# Altium PCB xxxxxx_PCB_Spectrum_Analyzer_x_Panel.PcbDoc
Units mm, origin at the board's own origin, x right, y up, seen from the top; angles counter-clockwise.
Board outline 118 x 144 mm, 4 copper layers (Top Layer, GND, 5V4, Bottom Layer), stack 1.31 mm thick; 10 components, 0 nets, 9 pads, 0 vias.
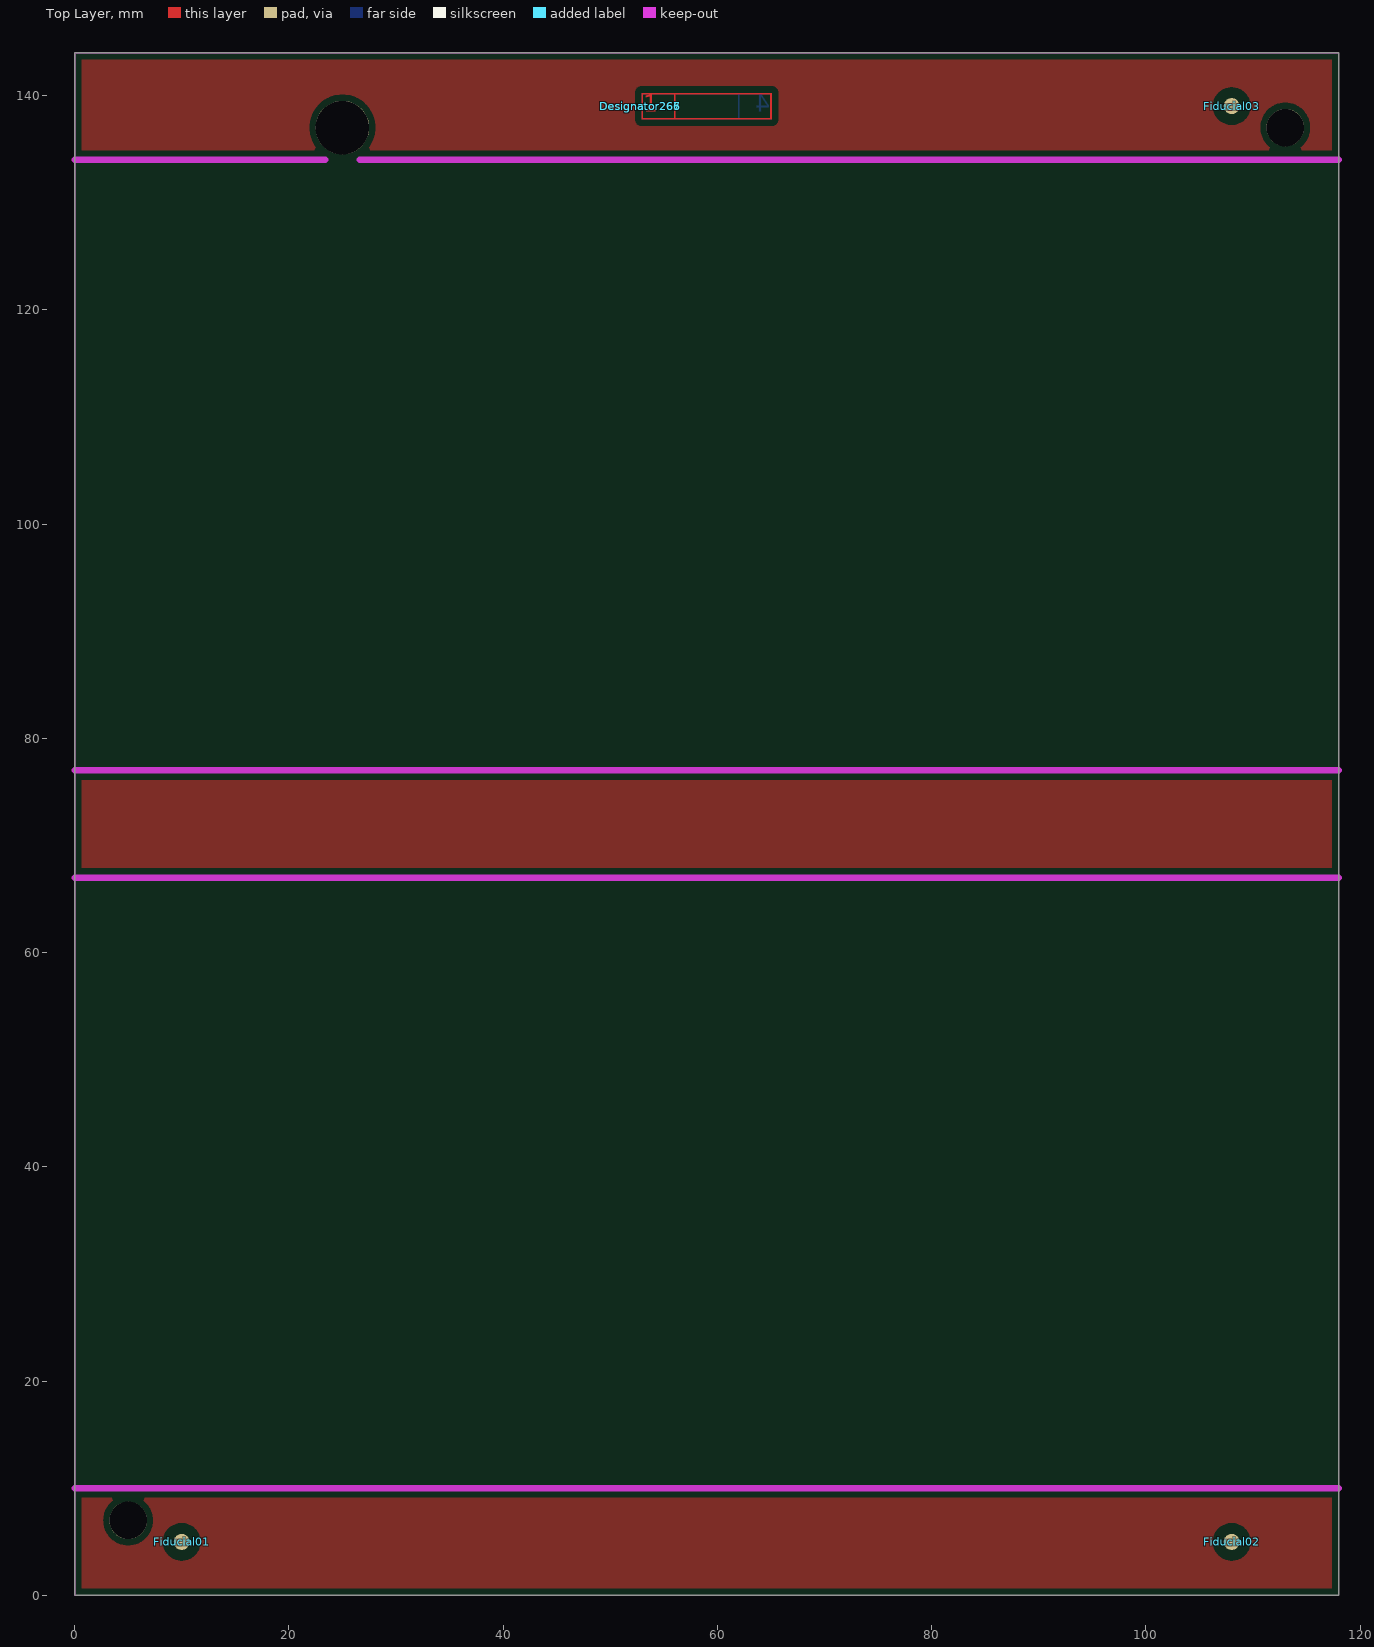
[diagram p0: Top Layer view]
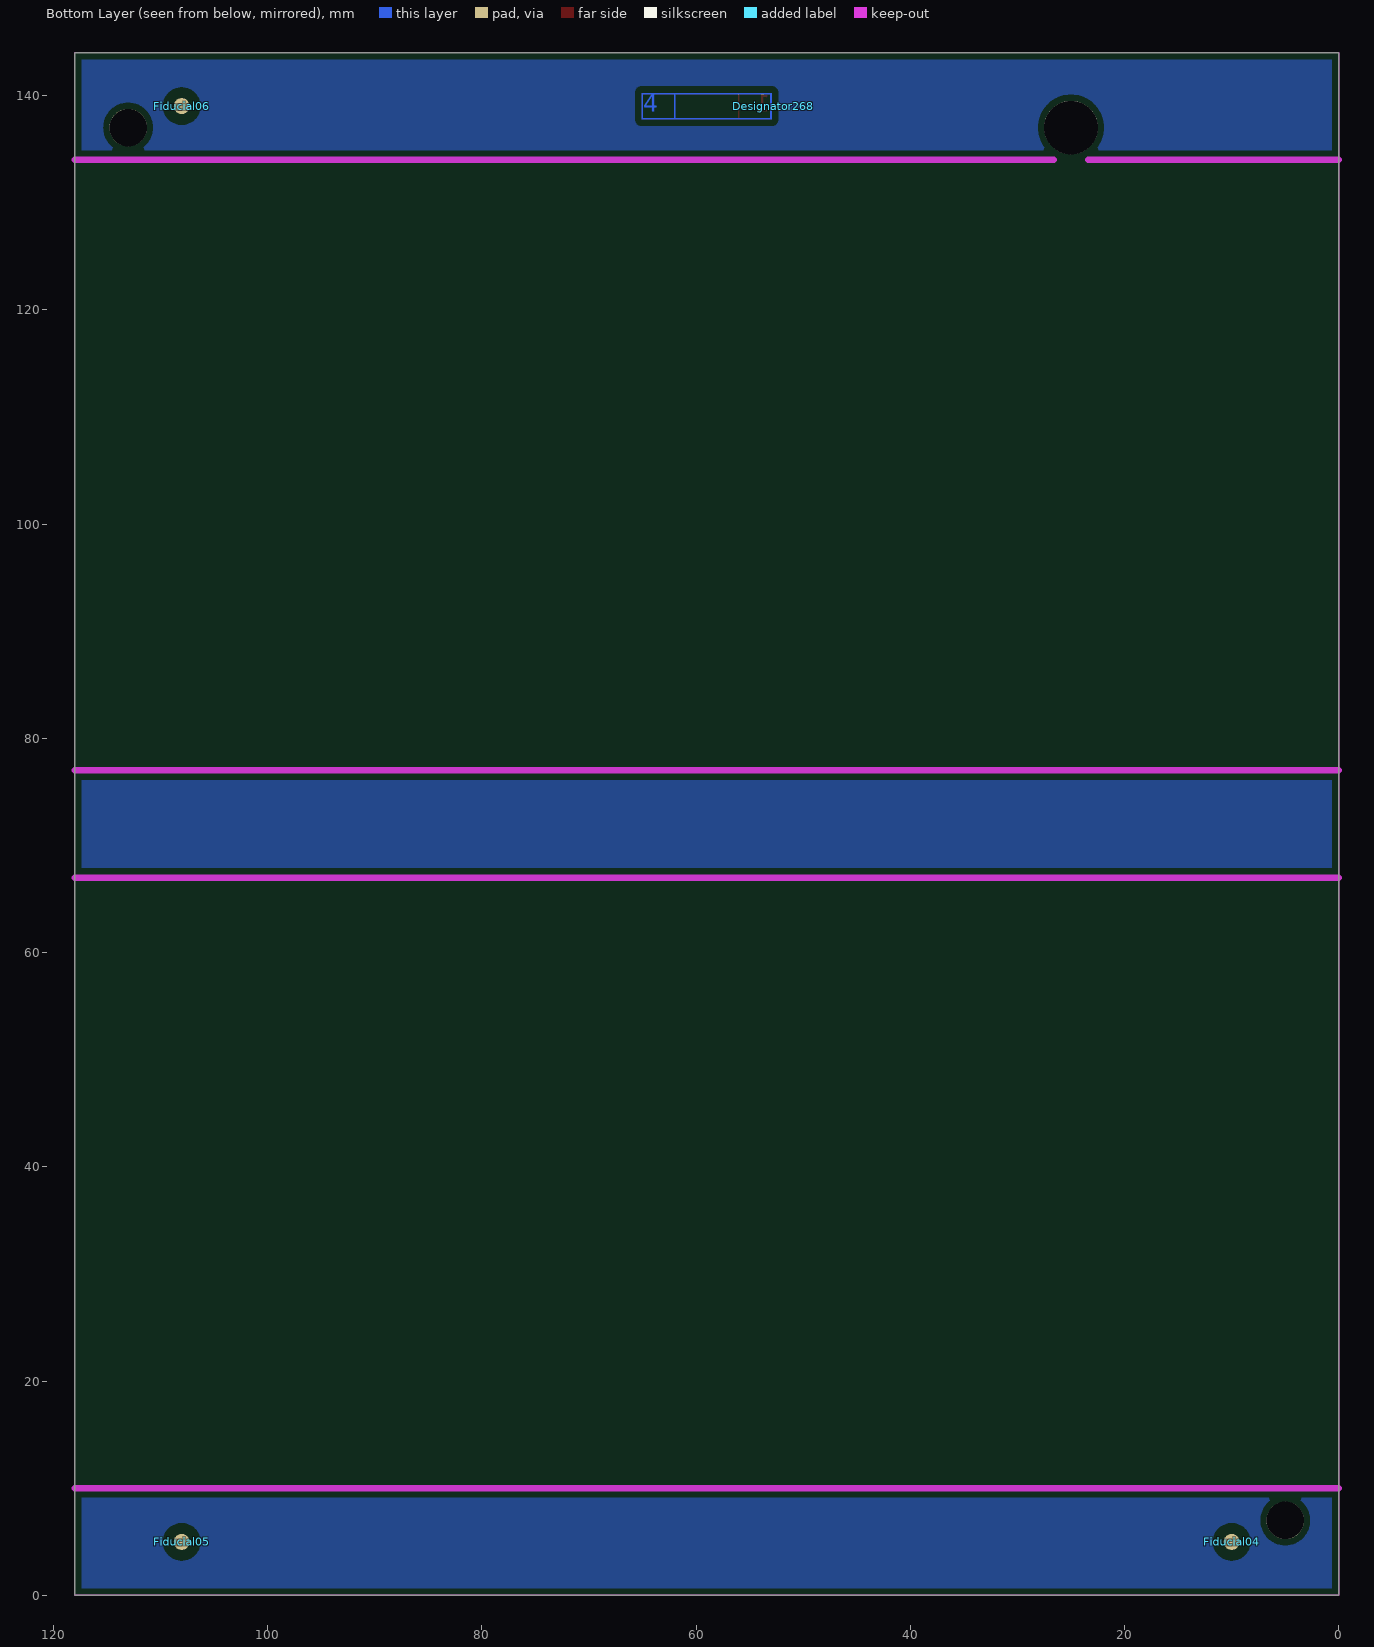
[diagram p1: Bottom Layer view, seen from below]
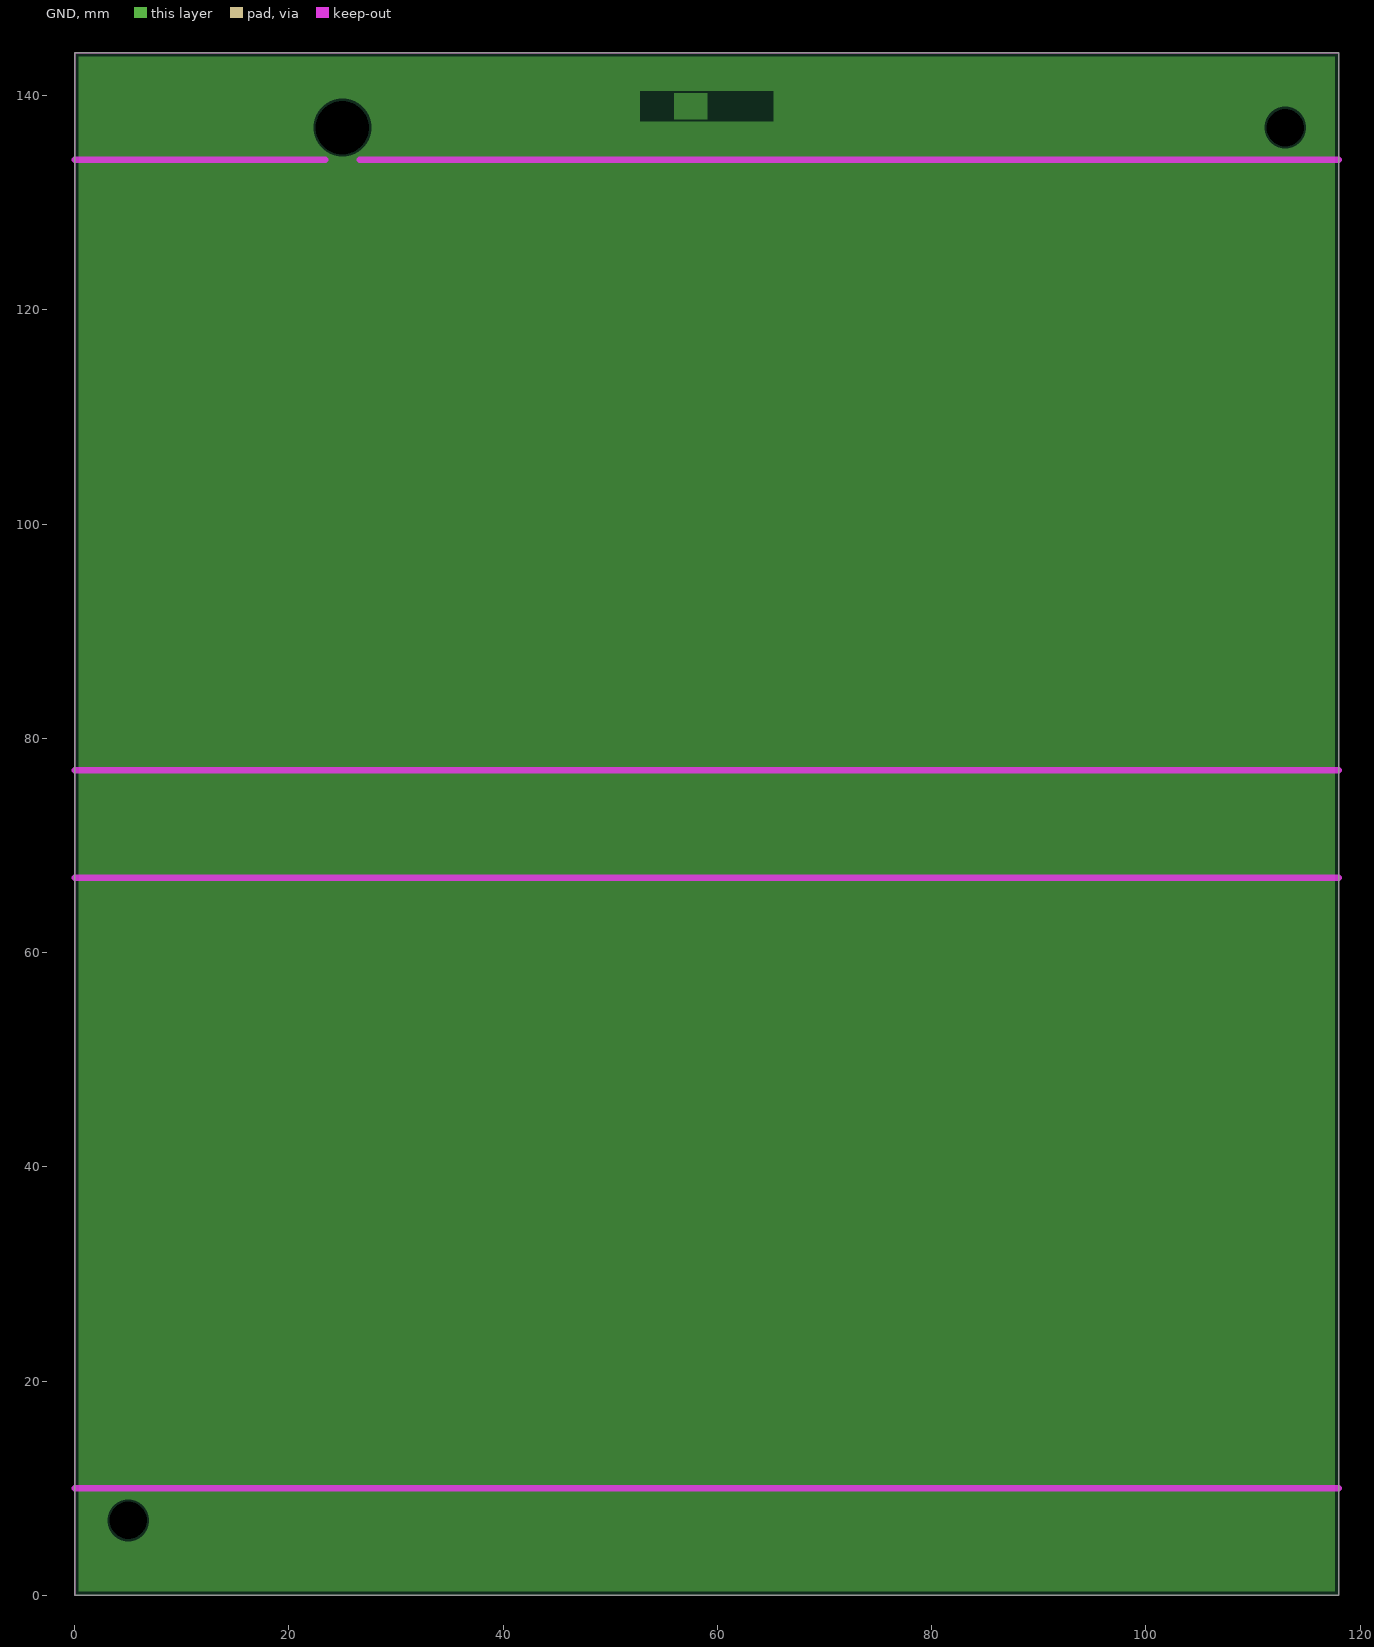
[diagram p2: GND, clearances drawn from the general rule]
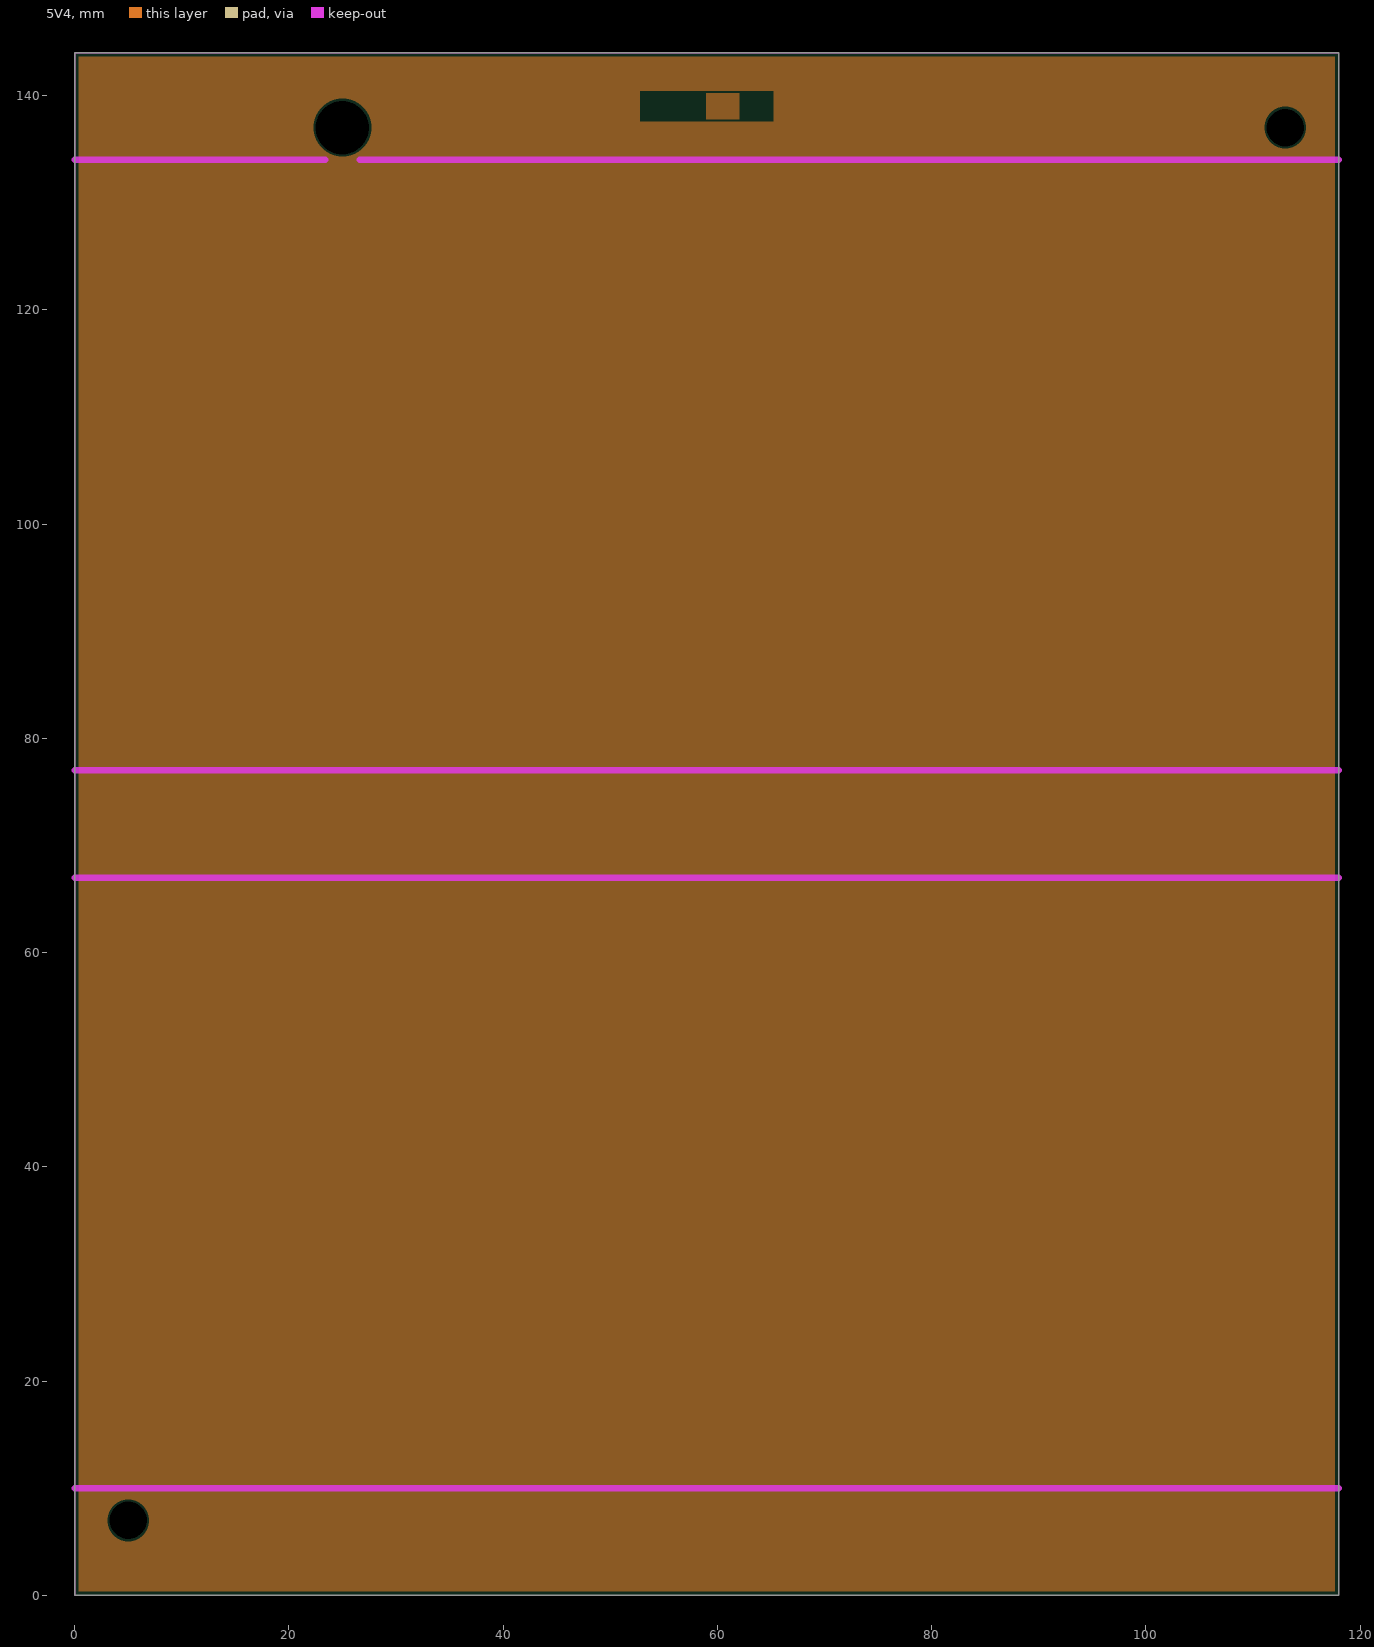
[diagram p3: 5V4, clearances drawn from the general rule]

## Layer stack, top to bottom
Top Solder: solder mask 0.01, Solder Resist, Dk 3.5
Top Layer: signal copper 0.035
Dielectric1: prepreg 0.1, DE104, Dk 4.37
GND: plane copper 0.07
Dielectric4: core 0.9, DE104, Dk 4.37
5V4: plane copper 0.07
Dielectric5: prepreg 0.1, DE104, Dk 4.37
Bottom Layer: signal copper 0.035
Bottom Solder: solder mask 0.01, Solder Resist, Dk 3.5

## Board outline
0,0 0,144 118,144 118,0

## Design rules (kind name [scope] priority, off if disabled: settings)
AssemblyTestPointUsage [All] p1: valid=2
AssemblyTestpoint [All] p1: testpointundercomponent=TRUE minsize=0.8 maxsize=2.5 preferedsize=1 minholesize=0 maxholesize=1.5 preferedholesize=0.2 testpointgrid=0.025 usegrid=FALSE gridoriginx=25.375 gridoriginy=25.375 gridtolerance=0 allowsidetop=TRUE allowsidebottom=TRUE minspacing=2.5
Clearance "Clearance_Fiducial - All" [HasFootprint('Fiducial_10') or HasFootprint ('Fiducial_15')] p1: gap=1 ignorepadtopadclearanceinfootprint=FALSE
Clearance Clearance_All [All] p2: gap=0.6 ignorepadtopadclearanceinfootprint=FALSE
ComponentClearance ComponentClearance_Numbers [HasFootprint('PLANE-02') OR HasFootprint('PLANE-03') OR HasFootprint('PLANE-04') OR HasFootprint('PLANE-05') OR HasFootprint('PLANE-06') OR HasFootprint('PLANE-07') OR HasFootprint('PLANE-08') OR HasFootprint('PLANE-09') OR HasFootprint('PLANE-10') OR HasFootprint('PLANE-11') OR HasFootprint('PLANE-12') OR HasFootprint('PLANE-13') OR HasFootprint('PLANE-14') OR HasFootprint('PLANE-15') OR HasFootprint('PLANE-16') OR HasFootprint('SIGNAL-01') OR HasFootprint('SIGNAL-02') OR HasFootprint('SIGNAL-03') OR HasFootprint('SIGNAL-04') OR HasFootprint('SIGNAL-05') OR HasFootprint('SIGNAL-06') OR HasFootprint('SIGNAL-07') OR HasFootprint('SIGNAL-08') OR HasFootprint('SIGNAL-09') OR HasFootprint('SIGNAL-10') OR HasFootprint('SIGNAL-11') OR HasFootprint('SIGNAL-12') OR HasFootprint('SIGNAL-13') OR HasFootprint('SIGNAL-14') OR HasFootprint('SIGNAL-15') OR HasFootprint('SIGNAL-16') OR HasFootprint('SIGNAL-17') OR HasFootprint('SIGNAL-18') vs HasFootprint('PLANE-02') OR HasFootprint('PLANE-03') OR HasFootprint('PLANE-04') OR HasFootprint('PLANE-05') OR HasFootprint('PLANE-06') OR HasFootprint('PLANE-07') OR HasFootprint('PLANE-08') OR HasFootprint('PLANE-09') OR HasFootprint('PLANE-10') OR HasFootprint('PLANE-11') OR HasFootprint('PLANE-12') OR HasFootprint('PLANE-13') OR HasFootprint('PLANE-14') OR HasFootprint('PLANE-15') OR HasFootprint('PLANE-16') OR HasFootprint('SIGNAL-01') OR HasFootprint('SIGNAL-02') OR HasFootprint('SIGNAL-03') OR HasFootprint('SIGNAL-04') OR HasFootprint('SIGNAL-05') OR HasFootprint('SIGNAL-06') OR HasFootprint('SIGNAL-07') OR HasFootprint('SIGNAL-08') OR HasFootprint('SIGNAL-09') OR HasFootprint('SIGNAL-10') OR HasFootprint('SIGNAL-11') OR HasFootprint('SIGNAL-12') OR HasFootprint('SIGNAL-13') OR HasFootprint('SIGNAL-14') OR HasFootprint('SIGNAL-15') OR HasFootprint('SIGNAL-16') OR HasFootprint('SIGNAL-17') OR HasFootprint('SIGNAL-18')] p1: gap=0 collisioncheckmode=3 verticalgap=0 showdistances=FALSE
ComponentClearance [All] p2: gap=0.25 collisioncheckmode=3 verticalgap=0.25 showdistances=FALSE
FabricationTestPointUsage [All] p1: valid=2 allowmultiple=FALSE
FabricationTestpoint [All] p1: side=3 testpointundercomponent=TRUE minsize=1.016 maxsize=2.54 preferedsize=1.524 minholesize=0 maxholesize=1.016 preferedholesize=0.813 testpointgrid=0.025 allowsidetop=TRUE allowsidebottom=TRUE usegrid=TRUE gridtolerance=0 minspacing=2.5
HoleSize [All] p1: absolutevalues=TRUE maxlimit=10 minlimit=0.25 maxpercent=80.000 minpercent=20.000
HoleToHoleClearance [All] p1: gap=0.2 allowstackedmicrovias=FALSE
MinimumSolderMaskSliver [All] p1: minsoldermaskwidth=0.1
PasteMaskExpansion PasteMaskExpansion_All [All] p1: expansion=0
PlaneClearance [All] p1: clearance=0.2
PlaneConnect [All] p1: planeconnectstyle=Direct reliefexpansion=0.5 reliefentries=4 reliefconductorwidth=0.1 reliefairgap=0.2
PolygonConnect [All] p1: connectstyle=NoConnect reliefconductorwidth=0.1 reliefentries=4 polygonreliefangle="90 Angle" airgapwidth=0.5
RoutingCorners [All] p1: cornerstyle=45-Degree minsetback=2.5 maxsetback=2.5
RoutingVias [All] p1: holewidth=0.25 width=0.6 viastyle="Through Hole" minholewidth=0.25 minwidth=0.6 maxholewidth=0.25 maxwidth=0.6
SolderMaskExpansion SolderMaskExpansion_Via [IsVia] p1: expansion=-0.075
SolderMaskExpansion SolderMaskExpansion_All [All] p2: expansion=0.1
Width [All] p1: maxlimit=1 minlimit=0.25 preferedwidth=0.25 minimp=50.000000 maximp=50.000000 favimp=50.000000
18 further rules are at their usual default settings.

## Components (designator, comment, footprint, x,y, rotation, side; value= is the part's Value field where it differs from the comment)
Designator265 "Comment" SIGNAL-01 52.775,139 r0 top
Designator266 "Comment" PLANE-02 52.775,139 r0 top
Designator267 "Comment" PLANE-03 52.775,139 r0 top
Designator268 "Comment" SIGNAL-04 52.775,139 r0 bottom
Fiducial01 "01" Fiducial_15 10,5 r0 top
Fiducial02 "03" Fiducial_15 108,5 r0 top
Fiducial03 "05" Fiducial_15 108,139 r0 top
Fiducial04 "02" Fiducial_15 10,5 r0 bottom
Fiducial05 "04" Fiducial_15 108,5 r0 bottom
Fiducial06 "06" Fiducial_15 108,139 r0 bottom

## Footprints (in the part's own frame and the unit in brackets; to place one, negate y for a bottom-side part, rotate by r counter-clockwise, add the part's x,y. Pads: shape width x height; smd on the part's side, far side on the other; paste and mask are expansions set on the pad)
Fiducial_15 [mm] "Fiducial for SMD 1.5mm diameter"
  round 1.5 smd paste-1 mask+1: 1(0,0)
  body extent -0.5,-0.5 0.5,0.5, height 0
PLANE-02 [mm]
  GND region: 6.3,-1.4 12.45,-1.4 12.45,1.4 6.3,1.4
  GND region: 3.15,1.4 0,1.4 0,-1.4 3.15,-1.4
  GND region: 2.85,-1.25 2.85,-1.4 6.45,-1.4 6.45,-1.25
  GND region: 6.45,1.25 6.45,1.4 2.85,1.4 2.85,1.25
PLANE-03 [mm]
  5V4 region: 9.45,1.25 9.45,1.4 5.85,1.4 5.85,1.25
  5V4 region: 5.85,-1.25 5.85,-1.4 9.45,-1.4 9.45,-1.25
  5V4 region: 6.15,1.4 0,1.4 0,-1.4 6.15,-1.4
  5V4 region: 9.3,-1.4 12.45,-1.4 12.45,1.4 9.3,1.4
SIGNAL-01 [mm]
  Top Layer region: 0.3,1.25 0.15,1.25 0.15,-1.25 0.3,-1.25
  Top Layer region: 0.175,-1.1 0.175,-1.25 12.3,-1.25 12.3,-1.1
  Top Layer region: 12.3,1.1 12.3,1.25 0.15,1.25 0.15,1.1
  Top Layer region: 12.15,-1.25 12.3,-1.25 12.3,1.25 12.15,1.25
  Top Layer region: 3.15,-1.25 3.3,-1.25 3.3,1.25 3.15,1.25
  Top Layer pour cut-out: 0,1.4 0,-1.4 12.45,-1.4 12.45,1.4
SIGNAL-04 [mm]
  Top Layer region: 12.15,1.25 12.3,1.25 12.3,-1.25 12.15,-1.25
  Top Layer region: 0.15,1.1 0.15,1.25 12.3,1.25 12.3,1.1
  Top Layer region: 12.3,-1.1 12.3,-1.25 0.15,-1.25 0.15,-1.1
  Top Layer region: 9.3,-1.25 9.15,-1.25 9.15,1.25 9.3,1.25
  Top Layer region: 0.3,-1.25 0.15,-1.25 0.15,1.25 0.3,1.25
  Top Layer region: 12.15,1.25 12.3,1.25 12.3,-1.25 12.15,-1.25
  Top Layer pour cut-out: 0,1.4 0,-1.4 12.45,-1.4 12.45,1.4

## Free pads (board coordinates)
  round 3.5 hole 3.5 unplated: 17(5,7) 17(113,137)
  round 5 hole 5 unplated: 17(25,137)

## Nets (pads, with @x,y where several pads share a name; then routed paths per layer and width w, separated by ;. In a path a pad name is that pad's centre, name@x,y a point inside that pad or via, vN(x,y) a via of type N, cw(c..) or ccw(c..) an arc to the next point about the centre after c; other vN are vias at no path point)
pads on no net: Fiducial01.1 Fiducial02.1 Fiducial03.1 Fiducial04.1 Fiducial05.1 Fiducial06.1

## Polygon pours and split planes (outlines as drawn)
no net on Top Layer "NONET_L01_P092" (solid, pour order 92): 0,10 0,0 118,0 118,10
no net on Top Layer "NONET_L01_P090" (solid, pour order 90): 0,77 0,67 118,67 118,77
no net on Top Layer "NONET_L01_P088" (solid, pour order 88): 0,144 0,134 118,134 118,144
no net on Bottom Layer "NONET_L04_P098" (solid, pour order 98): 0,144 0,134 118,134 118,144
no net on Bottom Layer "NONET_L04_P096" (solid, pour order 96): 0,77 0,67 118,67 118,77
no net on Bottom Layer "NONET_L04_P094" (solid, pour order 94): 0,10 0,0 118,0 118,10
no net on GND (split plane): 59.075,137.75 55.925,137.75 55.925,140.25 59.075,140.25
no net on GND (split plane): 117.648,0.352 0.352,0.352 0.352,143.648 117.648,143.648
no net on 5V4 (split plane): 62.075,137.75 58.925,137.75 58.925,140.25 62.075,140.25
no net on 5V4 (split plane): 117.648,0.352 0.352,0.352 0.352,143.648 117.648,143.648

## Keep-outs
Keep-Out Layer:
  lines w0.1: 0,0 0,144 118,144 118,0 0,0
  lines w0.6: 0,10 118,10 ; 0,67 118,67 ; 0,77 118,77 ; 0,134 23.4,134 ; 26.6,134 118,134

## Silkscreen, mask and mechanical layers (free items; w line width, h text height)
Top Solder:
  text "'.a01PartNr1' '.a02PartNr2'-'.a03Version'" at 0,1.5 h3
Geometry PCB:
  the board outline again, w0.1
V-Cut:
  lines w0.1: 0,10 118,10 ; 0,67 118,67 ; 0,77 118,77 ; 0,134 118,134

## Panel: embedded boards
"115743_PCB_3DUS_Emitter_Board.PcbDoc" at 0,77, 6 rows x 1 columns, spacing 20 x 57, rotation 0
"115743_PCB_3DUS_Emitter_Board.PcbDoc" at 0,10, 6 rows x 1 columns, spacing 20 x 57, rotation 0

## Text inside footprints (layer, text, board x,y; h text height)
Designator265: Top Layer "1" at 53.075,137.9 h2.75
Designator266: GND "2" at 56.075,137.9 h2.75
Designator267: 5V4 "3" at 61.925,137.9 h2.75
Designator268: Bottom Layer "4" at 64.925,137.9 h2.75